# Altium PCB 192dfirst.PcbDoc
Units mm, origin at the board's own origin, x right, y up, seen from the top; angles counter-clockwise.
Board outline 184.27 x 133.63 mm, 2 copper layers (Top Layer, Bottom Layer); 61 components, 98 nets, 180 pads, 0 vias.
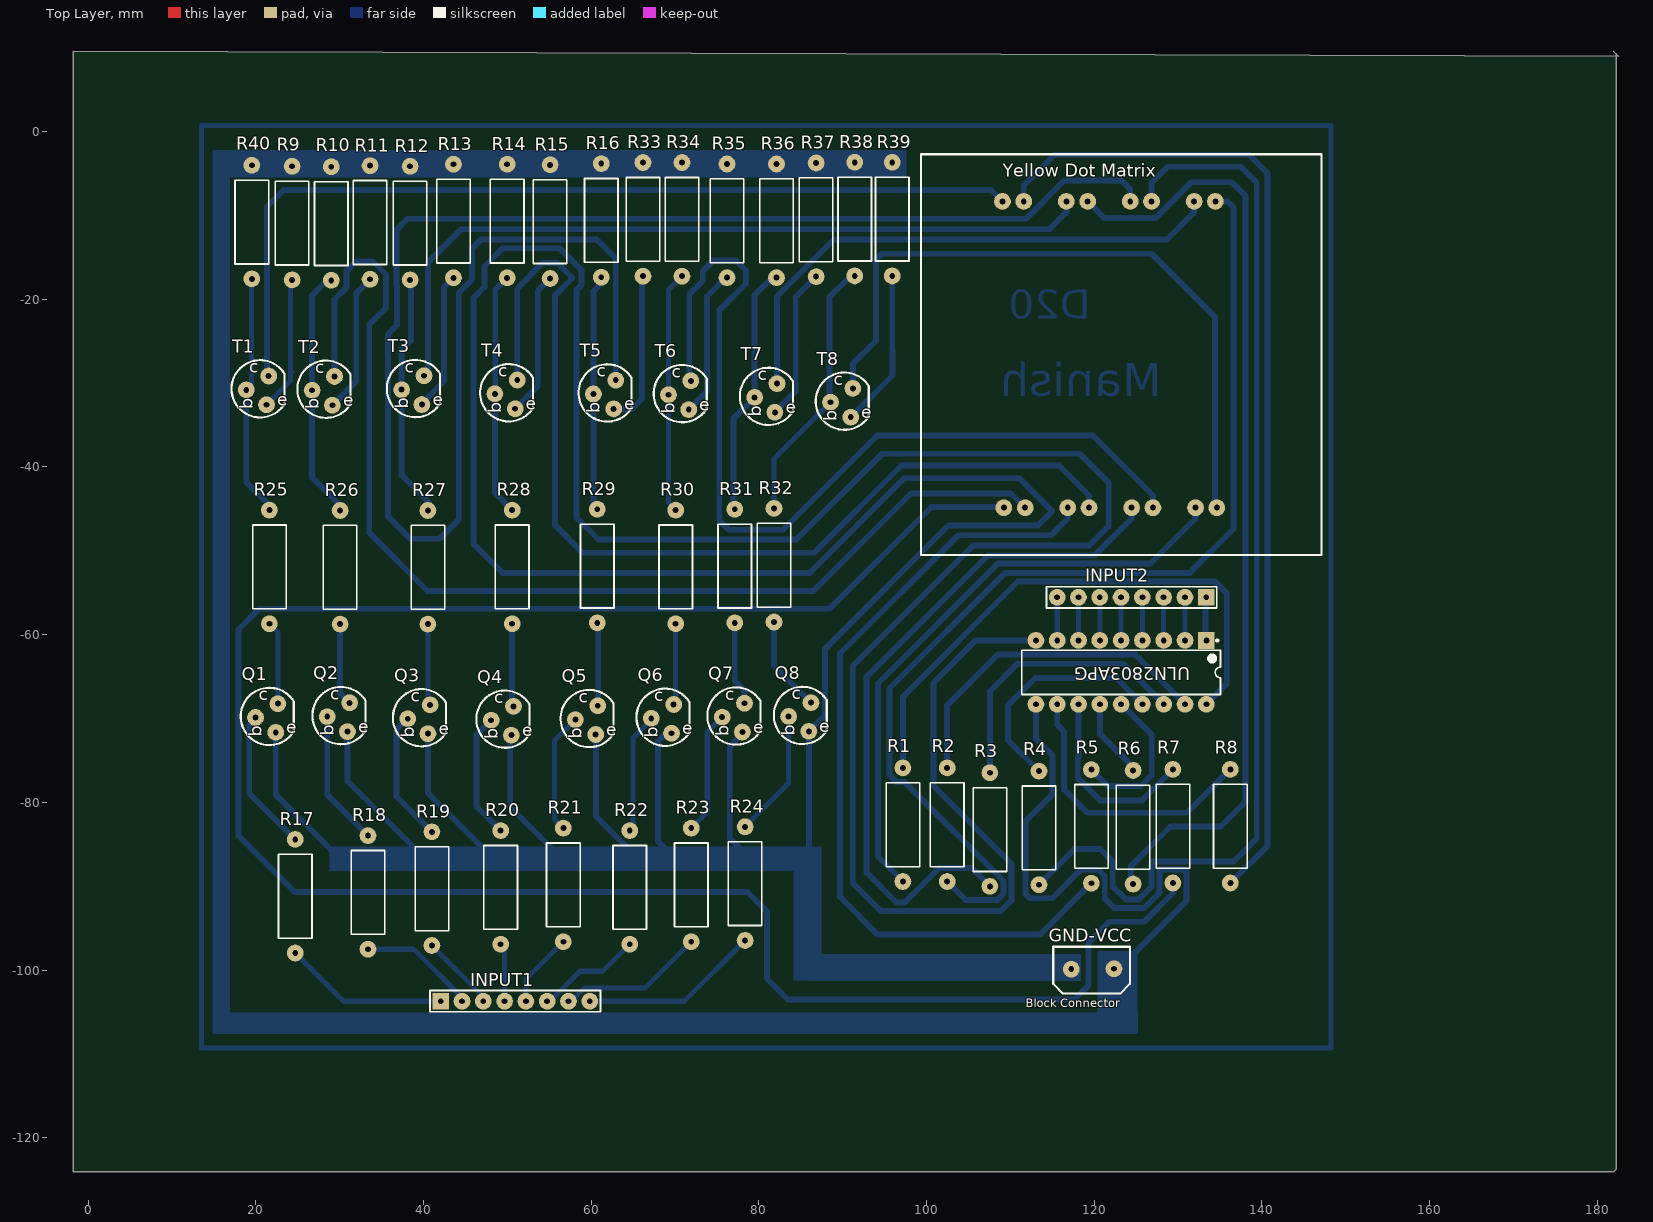
[diagram p0: Top Layer view]
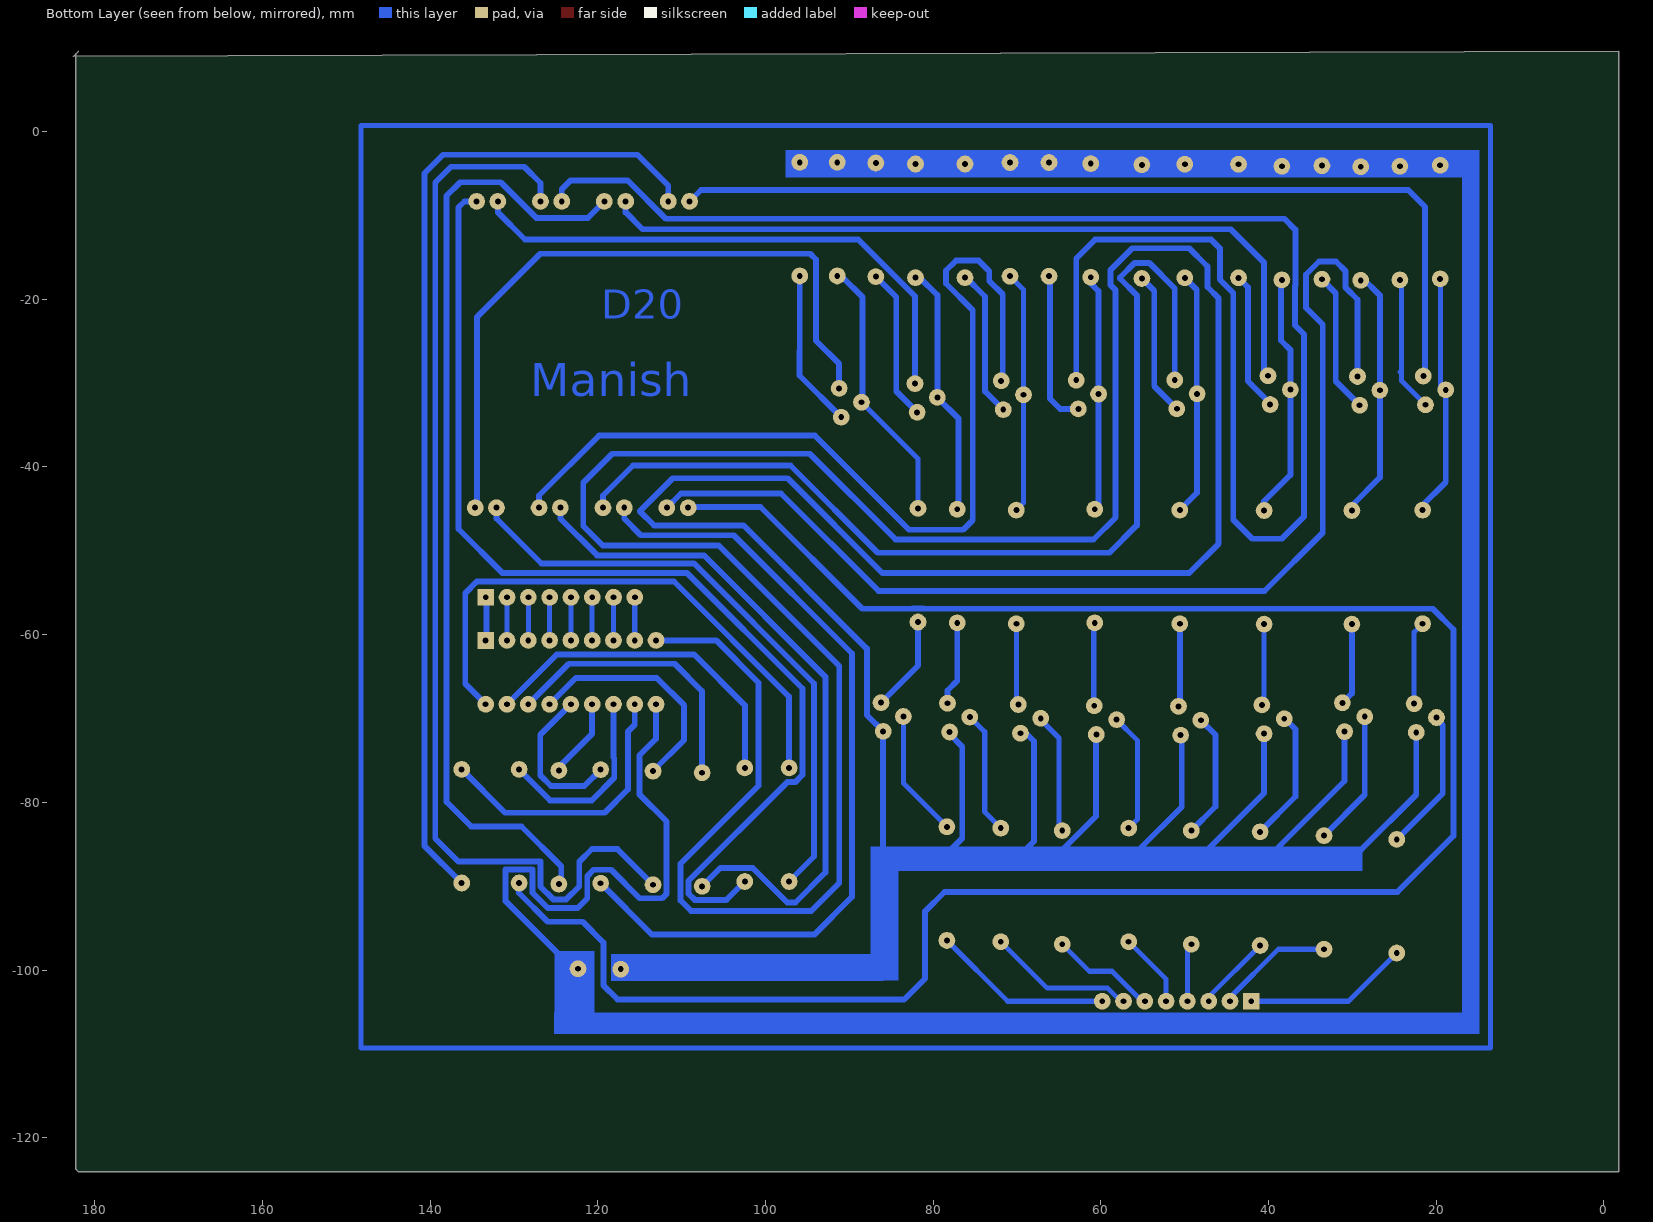
[diagram p1: Bottom Layer view, seen from below]

## Layer stack, top to bottom
Top Layer: signal copper 0.0356
Dielectric: dielectric 0.32, FR-4, Dk 4.8
Bottom Layer: signal copper 0.0356

## Board outline
-1.75,9.55 -1.75,-124.075 181.925,-124.075 182.225,-123.775 182.225,9.25 181.925,9.55 182.525,8.95

## Design rules (kind name [scope] priority, off if disabled: settings)
Clearance [All] p1: gap=0.254
PolygonConnect [All] p1: connectstyle=Relief reliefconductorwidth=0.254 reliefentries=4 polygonreliefangle="90 Angle"
RoutingVias [All] p1: holewidth=0.711 width=1.27 viastyle="Through Hole" minholewidth=0.711 minwidth=1.27 maxholewidth=0.711 maxwidth=1.27
SilkscreenOverComponentPads [All] p1: minsilkscreentomaskgap=0.254
SolderMaskExpansion [All] p1: expansion=0.102
Width [All] p1: maxlimit=0.8 minlimit=0.6 preferedwidth=0.7 minimp=50.000000 maximp=50.000000 favimp=50.000000
27 further rules are at their usual default settings.

## Components (designator, comment, footprint, x,y, rotation, side; value= is the part's Value field where it differs from the comment)
GND-VCC "Comment" "PCB Block Connector" 119.8,-99.875 r0 top
INPUT1 "Comment" HDR1X8 42.05,-103.725 r0 top
INPUT2 "Comment" HDR1X8 133.35,-55.55 r180 top
Q1 "Comment" "TO-92 Packaging" 21.3,-69.95 r0 top
Q2 "Comment" "TO-92 Packaging" 29.85,-69.85 r0 top
Q3 "Comment" "TO-92 Packaging" 39.45,-70.1 r0 top
Q4 "Comment" "TO-92 Packaging" 49.4,-70.275 r0 top
Q5 "Comment" "TO-92 Packaging" 59.45,-70.2 r0 top
Q6 "Comment" "TO-92 Packaging" 68.5,-70.05 r0 top
Q7 "Comment" "TO-92 Packaging" 76.95,-69.9 r0 top
Q8 "Comment" "TO-92 Packaging" 84.875,-69.825 r0 top
R1 "Comment" RES13.55-10X4 97.175,-82.675 r270 top
R2 "Comment" RES13.55-10X4 102.45,-82.675 r270 top
R3 "Comment" RES13.55-10X4 107.55,-83.25 r270 top
R4 "Comment" RES13.55-10X4 113.4,-83.05 r270 top
R5 "Comment" RES13.55-10X4 119.65,-82.875 r270 top
R6 "Comment" RES13.55-10X4 124.625,-82.975 r270 top
R7 "Comment" RES13.55-10X4 129.375,-82.85 r270 top
R8 "Comment" RES13.55-10X4 136.225,-82.85 r270 top
R9 "Comment" RES13.55-10X4 24.325,-10.925 r90 top
R10 "Comment" RES13.55-10X4 29,-10.975 r90 top
R11 "Comment" RES13.55-10X4 33.625,-10.85 r90 top
R12 "Comment" RES13.55-10X4 38.4,-10.925 r90 top
R13 "Comment" RES13.55-10X4 43.575,-10.675 r90 top
R14 "Comment" RES13.55-10X4 49.975,-10.675 r90 top
R15 "Comment" RES13.55-10X4 55.1,-10.75 r90 top
R16 "Comment" RES13.55-10X4 61.2,-10.6 r90 top
R17 "Comment" RES13.55-10X4 24.7,-91.2 r90 top
R18 "Comment" RES13.55-10X4 33.375,-90.75 r90 top
R19 "Comment" RES13.55-10X4 41,-90.3 r90 top
R20 "Comment" RES13.55-10X4 49.2,-90.15 r90 top
R21 "Comment" RES13.55-10X4 56.675,-89.85 r90 top
R22 "Comment" RES13.55-10X4 64.6,-90.15 r90 top
R23 "Comment" RES13.55-10X4 71.925,-89.85 r90 top
R24 "Comment" RES13.55-10X4 78.35,-89.7 r90 top
R25 "Comment" RES13.55-10X4 21.625,-51.925 r90 top
R26 "Comment" RES13.55-10X4 30.05,-51.975 r90 top
R27 "Comment" RES13.55-10X4 40.525,-51.975 r90 top
R28 "Comment" RES13.55-10X4 50.575,-51.925 r90 top
R29 "Comment" RES13.55-10X4 60.725,-51.825 r90 top
R30 "Comment" RES13.55-10X4 70.075,-51.925 r90 top
R31 "Comment" RES13.55-10X4 77.125,-51.825 r90 top
R32 "Comment" RES13.55-10X4 81.8,-51.725 r90 top
R33 "Comment" RES13.55-10X4 66.175,-10.475 r90 top
R34 "Comment" RES13.55-10X4 70.825,-10.475 r90 top
R35 "Comment" RES13.55-10X4 76.2,-10.65 r90 top
R36 "Comment" RES13.55-10X4 82.1,-10.65 r90 top
R37 "Comment" RES13.55-10X4 86.825,-10.525 r90 top
R38 "Comment" RES13.55-10X4 91.425,-10.45 r90 top
R39 "Comment" RES13.55-10X4 95.9,-10.45 r90 top
R40 "Comment" RES13.55-10X4 19.525,-10.8 r90 top
T1 "Comment" "TO-92 Packaging" 20.2,-30.875 r0 top
T2 "Comment" "TO-92 Packaging" 28.05,-30.925 r0 top
T3 "Comment" "TO-92 Packaging" 38.725,-30.85 r0 top
T4 "Comment" "TO-92 Packaging" 49.85,-31.35 r0 top
T5 "Comment" "TO-92 Packaging" 61.6,-31.369 r0 top
T6 "Comment" "TO-92 Packaging" 70.55,-31.45 r0 top
T7 "Comment" "TO-92 Packaging" 80.825,-31.775 r0 top
T8 "Comment" "TO-92 Packaging" 89.875,-32.35 r0 top
ULN2803APG "Comment" DIP-18 123.2,-64.5 r270 top
"Yellow Dot Matrix" "Comment" "Yellow or Green Dot Matrix DIsplay" 123.1,-26.6 r0 top

## Footprints (in the part's own frame and the unit in brackets; to place one, negate y for a bottom-side part, rotate by r counter-clockwise, add the part's x,y. Pads: shape width x height; smd on the part's side, far side on the other; paste and mask are expansions set on the pad)
DIP-18 [mm] "DIP, 18-Pin, Row Spacing 7.62 mm, Pitch 2.54 mm"
  rect 2x2 hole 0.7: 1(-3.81,10.16)
  round 2 hole 0.7: 2(-3.81,7.62) 3(-3.81,5.08) 4(-3.81,2.54) 5(-3.81,0) 6(-3.81,-2.54) 7(-3.81,-5.08) 8(-3.81,-7.62) 9(-3.81,-10.16) 10(3.81,-10.16) 11(3.81,-7.62) 12(3.81,-5.08) 13(3.81,-2.54) 14(3.81,0) 15(3.81,2.54) 16(3.81,5.08) 17(3.81,7.62) 18(3.81,10.16)
  silkscreen extent -3.93,-11.85 2.65,11.85, body extent -3.6,-11.8 3.6,11.8, height 5.33
HDR1X8 [mm]
  rect 2x2 hole 0.7: 1(0,0)
  round 2 hole 0.7: 2(2.54,0) 3(5.08,0) 4(7.62,0) 5(10.16,0) 6(12.7,0) 7(15.24,0) 8(17.78,0)
  silkscreen extent -1.27,-1.27 19.05,1.27
"PCB Block Connector" [mm]
  round 2 hole 0.7: 1(-2.547,-0.023) 2(2.547,0.023)
  silkscreen extent -4.7,-2.94 4.45,2.65
RES13.55-10X4 [mm] "Resistor, Axial; Body 10 x 4 mm (LxDia. max), Lead Dia. 0.65 mm (max)"
  round 2 hole 0.7: 1(-6.775,0) 2(6.775,0)
  silkscreen extent -5,-2 5,2
"TO-92 Packaging" [mm] "for 2N3904"
  round 2 hole 0.7: T(-1.333,0.063) T(1.079,-1.715) T(1.333,1.714)
  silkscreen extent -3.1,-3.23 3.22,3.61
"Yellow or Green Dot Matrix DIsplay" [mm] "Y or G Dot Matrix"
  round 2 hole 0.7: 3(-13.886,-18.262) 4(-11.346,-18.262) 6(-6.266,-18.262) 7(-3.726,-18.262) 9(1.354,-18.262) 10(3.894,-18.262) 12(8.974,-18.262) 13(11.514,-18.262) 20(11.346,18.262) 21(8.806,18.262) 23(3.726,18.262) 24(1.186,18.262) 26(-3.894,18.262) 27(-6.434,18.262) 29(-11.514,18.262) 30(-14.054,18.262)
  silkscreen extent -23.78,-23.9 23.99,23.89

## Nets (pads, with @x,y where several pads share a name; then routed paths per layer and width w, separated by ;. In a path a pad name is that pad's centre, name@x,y a point inside that pad or via, vN(x,y) a via of type N, cw(c..) or ccw(c..) an arc to the next point about the centre after c; other vN are vias at no path point)
1B: INPUT2.1 ULN2803APG.1 | length 5.2
  Bottom Layer w0.7: INPUT2.1 133.26,-55.64 133.26,-60.59 ULN2803APG.1
1C: R1.1 ULN2803APG.18 | length 67.7
  Bottom Layer w0.7: R1.1 97.175,-67.4 110.907,-53.668 134.411,-53.668 135.8,-55.057 135.8,-65.87 ULN2803APG.18
1D: "Yellow Dot Matrix.3" R7.2 | length 256.3
  Bottom Layer w0.7: 109.214,-44.775 100.575,-44.775 88.433,-56.917 82.486,-56.917 82.464,-56.896 81.136,-56.896 81.114,-56.917 20.408,-56.917 17.933,-59.392 17.933,-84.002 24.63,-90.699 78.649,-90.699 80.95,-93 80.95,-101.025 83.45,-103.525 117.625,-103.525 119.325,-101.825 119.325,-96.725 121.8,-94.25 125.95,-94.25 129.375,-90.825 R7.2 R7.2@128.888,-90.112
1U: 
2B: INPUT2.2 ULN2803APG.2 | length 5.1
  Bottom Layer w0.6: INPUT2.2 130.82,-55.56 ULN2803APG.2
2C: R2.1 ULN2803APG.17 | length 40.8
  Bottom Layer w0.7: R2.1 102.45,-68.431 108.502,-62.378 124.888,-62.378 ULN2803APG.17
2D: "Yellow Dot Matrix.4" T2.T@29.384,-29.211 | length 137.2
  Bottom Layer w0.7: T2.T@29.384,-29.211 29.384,-20.041 30.8,-18.625 30.8,-16.65 31.95,-15.5 33.975,-15.5 35.525,-17.05 35.525,-21.025 33.525,-23.025 33.525,-47.85 40.484,-54.809 86.496,-54.809 98.129,-43.176 110.068,-43.176 111.754,-44.862
2U: 
3B: INPUT2.3 ULN2803APG.3 | length 5.1
  Bottom Layer w0.6: INPUT2.3 128.28,-55.56 ULN2803APG.3
3C: R3.1 ULN2803APG.16 | length 33.8
  Bottom Layer w0.7: R3.1 107.55,-66.738 110.817,-63.471 123.441,-63.471 ULN2803APG.16
3D: "Yellow Dot Matrix.6" R5.2 | length 98.5
  Bottom Layer w0.7: 116.834,-44.862 116.834,-46.162 114.849,-48.146 103.779,-48.146 89.675,-62.25 89.675,-91.279 94.176,-95.779 113.521,-95.779 R5.2
3U: 
4B: INPUT2.4 ULN2803APG.4 | length 5.1
  Bottom Layer w0.6: INPUT2.4 125.74,-55.56 ULN2803APG.4
4C: R4.1 ULN2803APG.15 | length 28.1
  Bottom Layer w0.7: R4.1 109.695,-72.57 109.695,-68.443 112.965,-65.172 122.602,-65.172 ULN2803APG.15
4D: "Yellow Dot Matrix.7" T4.T@51.183,-29.636 | length 122.1
  Bottom Layer w0.7: T4.T@51.183,-29.636 51.183,-18.717 54.232,-15.668 55.968,-15.668 57.712,-17.412 57.712,-17.531 55.7,-19.543 55.7,-46.975 58.962,-50.237 86.588,-50.237 97,-39.825 115.787,-39.825 119.374,-43.412 119.374,-44.862
4U: 
5B: INPUT2.5 ULN2803APG.5 | length 5.1
  Bottom Layer w0.6: INPUT2.5 123.2,-55.56 ULN2803APG.5
5C: R5.1 ULN2803APG.14 | length 18.5
  Bottom Layer w0.7: R5.1 121.6,-78.05 125.575,-78.05 126.85,-76.775 126.85,-71.96 ULN2803APG.14
5D: "Yellow Dot Matrix.9" R3.2 | length 82.9
  Bottom Layer w0.7: R3.2 105.368,-87.843 101.503,-87.843 97.401,-91.944 96.411,-91.944 92.85,-88.383 92.85,-65.025 107.325,-50.55 120.065,-50.55 124.454,-46.162 124.454,-44.862
5U: 
6B: INPUT2.6 ULN2803APG.6 | length 5.1
  Bottom Layer w0.6: INPUT2.6 120.66,-55.56 ULN2803APG.6
6C: R6.1 ULN2803APG.13 | length 8.7
  Bottom Layer w0.7: ULN2803APG.13 120.66,-71.835 R6.1@124.35,-75.525
6D: "Yellow Dot Matrix.10" T6.T@71.884,-29.736 | length 112.3
  Bottom Layer w0.7: T6.T@71.884,-29.736 71.7,-29.552 71.7,-19.425 73.3,-17.825 73.3,-16.65 74.548,-15.402 77.277,-15.402 78.45,-16.575 78.45,-18.125 75.269,-21.306 75.269,-46.344 76.419,-47.494 82.873,-47.494 94.092,-36.275 119.857,-36.275 126.994,-43.412 126.994,-44.862
6U: 
7B: INPUT2.7 ULN2803APG.7 | length 5.1
  Bottom Layer w0.6: INPUT2.7 118.12,-55.56 ULN2803APG.7
7C: R7.1 ULN2803APG.12 | length 22.8
  Bottom Layer w0.7: ULN2803APG.12 118.12,-74.621 118.026,-74.715 118.026,-77.085 120.716,-79.775 125.675,-79.775 R7.1
7D: "Yellow Dot Matrix.12" R1.2 | length 72.2
  Bottom Layer w0.7: R1.2 94.2,-86.475 94.2,-65.825 108.5,-51.525 126.71,-51.525 132.074,-46.162 132.074,-44.862
7U: 
8B: INPUT2.8 ULN2803APG.8 | length 5.1
  Bottom Layer w0.6: INPUT2.8 115.58,-55.56 ULN2803APG.8
8C: R8.1 ULN2803APG.11 | length 33.6
  Bottom Layer w0.7: ULN2803APG.11 115.58,-70.753 116.4,-71.573 116.4,-78.481 119.169,-81.25 131.05,-81.25 R8.1
8D: "Yellow Dot Matrix.13" T8.T@91.209,-30.636 | length 83.2
  Bottom Layer w0.7: T8.T@91.209,-30.636 91.209,-27.711 93.975,-24.944 93.975,-15.259 94.658,-14.576 126.851,-14.576 134.375,-22.1 134.375,-44.623 134.614,-44.862
8U: 
9D: "Yellow Dot Matrix.20" R2.2 | length 128.3
  Bottom Layer w0.7: R2.2 104.639,-91.639 108.425,-91.639 109.162,-90.903 109.162,-89.368 97.386,-77.593 96.436,-77.593 95.571,-76.728 95.571,-66.429 109.368,-52.632 131.379,-52.632 136.6,-47.411 136.6,-9.041 135.896,-8.338 134.446,-8.338
10D: "Yellow Dot Matrix.21" T7.T@82.158,-30.06 | length 65.6
  Bottom Layer w0.7: T7.T@82.158,-30.06 82.158,-19.642 88.925,-12.875 128.669,-12.875 131.906,-9.638 131.906,-8.338
11D: "Yellow Dot Matrix.23" R4.2 | length 131.3
  Bottom Layer w0.7: R4.2 117.653,-85.572 120.688,-85.572 122.208,-87.092 122.208,-90.033 123.75,-91.575 125.3,-91.575 126.817,-90.058 126.817,-87.067 136.619,-87.067 139.375,-84.311 139.375,-6.075 137.5,-4.2 128.775,-4.2 126.826,-6.149 126.826,-8.338
12D: "Yellow Dot Matrix.24" T5.T@62.934,-29.655 | length 203
  Bottom Layer w0.7: T5.T@62.934,-29.655 62.934,-15.134 60.7,-12.9 46.825,-12.9 45.8,-13.925 45.8,-17.65 44.2,-19.25 44.2,-46.3 41.925,-48.575 38.425,-48.575 35.75,-45.9 35.75,-24.2 36.85,-23.1 36.85,-18.418 36.796,-18.364 36.796,-11.704 38.1,-10.4 111.875,-10.4 116.449,-5.826 123.225,-5.826 124.286,-6.888 124.286,-8.338
13D: "Yellow Dot Matrix.26" R6.2 | length 112.6
  Bottom Layer w0.7: 119.206,-8.338 121.169,-10.3 127.325,-10.3 131.575,-6.05 136.399,-6.05 138.025,-7.676 138.025,-79.946 135.095,-82.876 129.092,-82.876 124.35,-87.619 R6.2@124.35,-89.075
14D: "Yellow Dot Matrix.27" T3.T@40.058,-29.135 | length 93.6
  Bottom Layer w0.7: T3.T@40.058,-29.135 40.55,-28.644 40.55,-15.6 44.5,-11.65 114.654,-11.65 116.666,-9.638 116.666,-8.338
15D: "Yellow Dot Matrix.29" R8.2 | length 119.9
  Bottom Layer w0.7: 111.586,-8.338 111.586,-6.439 115.25,-2.775 138.45,-2.775 140.675,-5 140.675,-85.175 R8.2
16D: "Yellow Dot Matrix.30" T1.T@21.534,-29.16 | length 109.3
  Bottom Layer w0.7: T1.T@21.325,-29.16 21.325,-8.984 23.328,-6.981 107.69,-6.981 109.046,-8.338
b1: R25.2 R40.1 T1.T@18.867,-30.811 | length 29
  Bottom Layer w0.6: T1.T@19.5,-30.811 R40.1@19.5,-17.325
  Bottom Layer w0.7: T1.T@18.867,-30.811 18.867,-41.817 21.625,-44.575 R25.2
b2: R10.1 R26.2 T2.T@26.717,-30.862 | length 30.1
  Bottom Layer w0.7: R10.1@28.85,-17.4 26.717,-19.533 26.717,-30.862 26.717,-41.267 30.05,-44.6 R26.2@30.05,-45.275
b3: R12.1 R27.2 T3.T@37.391,-30.786 | length 29.6
  Bottom Layer w0.7: R12.1@38.5,-17.375 38.5,-24.925 37.391,-26.034 37.391,-30.786 37.391,-40.966 40.525,-44.1 R27.2
b4: R14.1 R28.2 T4.T@48.516,-31.287 | length 29.4
  Bottom Layer w0.7: T4.T@48.516,-31.287 48.516,-43.091 R28.2 ; T4.T@48.55,-31.525 48.55,-18.875 R14.1
b5: R16.1 R29.2 T5.T@60.267,-31.306 | length 28.3
  Bottom Layer w0.7: R29.2 60.267,-44.591 60.267,-31.306 60.267,-19.033 61.15,-18.15 R16.1@61.15,-17.325
b6: R30.2 R34.1 T6.T@69.217,-31.387 | length 28.9
  Bottom Layer w0.6: R30.2 69.217,-44.291 69.217,-31.387 69.217,-18.858 R34.1
b7: R31.2 R36.1 T7.T@79.491,-31.711 | length 30.1
  Bottom Layer w0.7: R31.2@76.95,-45.075 76.95,-34.253 79.491,-31.711 79.491,-19.509 81.575,-17.425 R36.1
b8: R32.2 R38.1 T8.T@88.542,-32.287 | length 31.3
  Bottom Layer w0.6: R32.2 81.8,-39.028 T8.T@88.542,-32.287
  Bottom Layer w0.7: T8.T@88.4,-32.287 88.4,-19.775 R38.1@90.775,-17.4
b9: Q1.T@19.967,-69.887 R17.2 | length 16.1
  Bottom Layer w0.7: Q1.T@19.4,-70.625 19.225,-70.8 19.225,-78.95 R17.2
b10: Q2.T@28.517,-69.786 R18.2 | length 16.2
  Bottom Layer w0.7: Q2.T@28.517,-69.786 28.517,-79.117 R18.2
b11: Q3.T@38.117,-70.037 R19.2 | length 16
  Bottom Layer w0.7: Q3.T@38.225,-69.85 36.775,-71.3 36.775,-79.3 R19.2
b12: Q4.T@48.067,-70.212 R20.2 | length 15.1
  Bottom Layer w0.7: Q4.T@48.067,-70.212 46.325,-71.953 46.325,-80.5 R20.2
b13: Q5.T@58.117,-70.137 R21.2 | length 14.4
  Bottom Layer w0.6: R21.2 55.642,-82.042 55.642,-72.612 Q5.T@58.117,-70.137
b14: Q6.T@67.167,-69.987 R22.2 | length 14.6
  Bottom Layer w0.6: R22.2 64.992,-82.983 64.992,-72.333 Q6.T@67.375,-69.95
b15: Q7.T@75.617,-69.837 R23.2 | length 14.8
  Bottom Layer w0.6: R23.2 73.842,-81.158 73.842,-71.587 73.867,-71.587 Q7.T@75.617,-69.837
b16: Q8.T@83.541,-69.762 R24.2 | length 15.3
  Bottom Layer w0.6: R24.2 83.541,-77.734 Q8.T@83.541,-69.762
c1: 
c2: 
c3: 
c4: 
c5: 
c6: 
c7: 
c8: 
c9: Q1.T@22.634,-68.236 R25.1 | length 10
  Bottom Layer w0.6: R25.1 22.634,-59.709 Q1.T@22.634,-68.236
c10: Q2.T@31.184,-68.135 R26.1 | length 9.8
  Bottom Layer w0.7: R26.1@30.05,-58.825 30.05,-67.002 Q2.T@31.184,-68.135
c11: Q3.T@40.784,-68.386 R27.1 | length 9.7
  Bottom Layer w0.6: R27.1 40.525,-68.127 Q3.T@40.784,-68.386
c12: Q4.T@50.734,-68.561 R28.1 | length 9.9
  Bottom Layer w0.7: Q4.T@50.575,-68.561 R28.1
c13: Q5.T@60.784,-68.486 R29.1 | length 9.7
  Bottom Layer w0.7: Q5.T@60.834,-68.28 R29.1@60.834,-58.6
c14: Q6.T@69.834,-68.336 R30.1 | length 9.7
  Bottom Layer w0.6: Q6.T@69.834,-68.336 70.075,-68.094 R30.1
c15: Q7.T@78.284,-68.186 R31.1 | length 10.1
  Bottom Layer w0.7: R31.1 77.125,-65.5 78.284,-66.659 Q7.T@78.284,-68.186
c16: Q8.T@86.208,-68.111 R32.1 | length 11.4
  Bottom Layer w0.7: R32.1 81.8,-63.702 Q8.T@86.208,-68.111
e1: R9.1 T1.T@21.28,-32.589 | length 16.4
  Bottom Layer w0.6: T1.T@21.28,-32.589 24.125,-29.744 24.125,-28.844 ; 24.3,-28.669 24.125,-28.844 ; R9.1 24.125,-17.9 24.125,-28.844
e2: R11.1 T2.T@29.13,-32.64 | length 16.9
  Bottom Layer w0.7: T2.T@29.13,-32.64 31.975,-29.794 31.975,-19.275 R11.1
e3: R13.1 T3.T@39.804,-32.564 | length 16.6
  Bottom Layer w0.7: T3.T@39.733,-32.492 42.45,-29.775 42.45,-18.575 R13.1
e4: R15.1 T4.T@50.929,-33.065 | length 17.3
  Bottom Layer w0.7: T4.T@50.929,-33.065 53.625,-30.369 53.625,-19 R15.1
e5: R33.1 T5.T@62.68,-33.084 | length 18.5
  Bottom Layer w0.7: T5.T@62.68,-33.084 64.841,-33.084 66.075,-31.85 66.075,-17.35 R33.1
e6: R35.1 T6.T@71.63,-33.165 | length 17.9
  Bottom Layer w0.7: T6.T@71.63,-33.165 73.8,-30.994 73.8,-19.675 R35.1@76.275,-17.2
e7: R37.1 T7.T@81.904,-33.489 | length 18.2
  Bottom Layer w0.7: T7.T@81.904,-33.489 84.4,-30.994 84.4,-19.725 R37.1
e8: R39.1 T8.T@90.955,-34.065 | length 18.7
  Bottom Layer w0.7: T8.T@90.955,-34.065 95.925,-29.094 95.925,-26.169 95.9,-26.194 R39.1@95.9,-17.5
e9: 
e10: 
e11: 
e12: 
e13: 
e14: 
e15: 
e16: 
GND: GND-VCC.1 Q1.T@22.38,-71.665 Q2.T@30.93,-71.564 Q3.T@40.53,-71.815 Q4.T@50.48,-71.99 Q5.T@60.53,-71.915 Q6.T@69.58,-71.765 Q7.T@78.03,-71.615 Q8.T@85.954,-71.54 ULN2803APG.9 | length 613.4
  Bottom Layer w0.7: Q1.T@22.38,-71.665 22.38,-79.09 28.986,-85.696 39.161,-85.696 ; Q2.T@30.93,-71.564 30.93,-77.464 39.161,-85.696 ; Q3.T@40.53,-71.815 40.53,-78.905 47.321,-85.696 ; 47.275,-16.1 47.275,-18.55 45.95,-19.875 45.95,-49.15 49.45,-52.65 86.05,-52.65 97.35,-41.35 111.05,-41.35 114.981,-45.281 113.287,-46.975 102.6,-46.975 87.9,-61.675 87.9,-69.594 85.954,-71.54 85.954,-93.73 ; 47.4,-15.975 49.45,-13.925 56.25,-13.925 58.825,-16.5 58.825,-18.325 58.225,-18.925 58.225,-46.025 60.862,-48.662 84.463,-48.662 94.7,-38.425 118.254,-38.425 121.725,-41.896 121.725,-47.046 119.396,-49.375 105.575,-49.375 91.2,-63.75 91.2,-89.629 94.531,-92.96 108.857,-92.96 110.127,-91.69 110.127,-87.321 100.83,-78.025 100.83,-65.734 105.875,-60.69 ULN2803APG.9 ; Q4.T@50.35,-71.99 50.35,-80.554 55.491,-85.696 ; Q5.T@60.575,-72.625 60.575,-81.661 64.545,-85.63 ; Q6.T@68.925,-71.765 67.975,-72.715 67.975,-84.64 69.03,-85.695 ; 77.9,-85.676 76.525,-84.301 76.525,-73.365 78.03,-71.86 Q7.T@78.03,-71.615 ; 81.789,-85.696 55.491,-85.696 ; 92.122,-99.898 GND-VCC.1 ; 39.161,-85.696 47.321,-85.696 ; 47.321,-85.696 55.491,-85.696
VCC: GND-VCC.2 R9.2 R10.2 R11.2 R12.2 R13.2 R14.2 R15.2 R16.2 R33.2 R34.2 R35.2 R36.2 R37.2 R38.2 R39.2 R40.2 ULN2803APG.10 | length 68.3
  Bottom Layer w0.7: ULN2803APG.10 113.04,-72.429 115.029,-74.418 115.029,-79.041 111.778,-82.292 111.778,-90.903 112.311,-91.436 115.004,-91.436 118.394,-88.046 120.49,-88.046 121.254,-88.81 121.254,-91.479 122.4,-92.625 125.926,-92.625 127.771,-90.78 127.771,-88.021 130.98,-88.021 130.98,-91.795 122.923,-99.852 GND-VCC.2
z1: INPUT1.1 R17.1 | length 19.7
  Bottom Layer w0.6: R17.1 30.45,-103.725 INPUT1.1
z2: INPUT1.2 R18.1 | length 14
  Bottom Layer w0.6: R18.1 38.825,-97.525 44.59,-103.29 INPUT1.2
z3: INPUT1.3 R19.1 | length 9.2
  Bottom Layer w0.6: R19.1 47.13,-103.205 INPUT1.3
z4: INPUT1.4 R20.1 | length 7
  Bottom Layer w0.6: R20.1 49.67,-97.395 INPUT1.4
z5: INPUT1.5 R21.1 | length 8.9
  Bottom Layer w0.6: INPUT1.5 52.21,-101.09 R21.1
z6: INPUT1.6 R22.1 | length 12.7
  Bottom Layer w0.6: INPUT1.6 55.092,-103.725 58.667,-100.15 61.375,-100.15 R22.1
z7: INPUT1.7 R23.1 | length 17.6
  Bottom Layer w0.6: INPUT1.7 57.632,-103.725 59.186,-102.171 66.379,-102.171 R23.1
z8: INPUT1.8 R24.1 | length 21.5
  Bottom Layer w0.6: INPUT1.8 71.1,-103.725 R24.1
copper on no net: | length 489.4
  Bottom Layer w0.6: 13.55,-109.275 13.55,0.725 148.225,0.725 148.225,-109.275 13.55,-109.275

## Other copper
Bottom Layer:
  rectangle net VCC: 14.85,-5.475 97.625,-2.2
  rectangle net GND: 28.775,-88.175 87.375,-85.3
  rectangle net GND: 84.15,-101.275 87.475,-85.3
  rectangle net GND: 85.925,-101.3 118.4,-98.1
  rectangle net VCC: 14.85,-107.4 16.9,-3.025
  rectangle net VCC: 14.85,-107.65 125.2,-105.05
  rectangle net VCC: 120.375,-106.45 125.125,-97.725
  text "D20" at 119.575,-22.325 h3.5
  text "Manish" at 128.025,-31.55 h3.94

## Text inside footprints (layer, text, board x,y; h text height)
GND-VCC: Top Overlay "Block Connector" at 111.799,-104.447 h1.02
Q1: Top Overlay "c" at 20.348,-67.854 h1.5; Top Overlay "e" at 23.65,-71.791 h1.5; Top Overlay "b" at 20.729,-72.172 h1.52 r90
Q2: Top Overlay "c" at 28.898,-67.754 h1.5; Top Overlay "e" at 32.2,-71.691 h1.5; Top Overlay "b" at 29.279,-72.072 h1.52 r90
Q3: Top Overlay "c" at 38.497,-68.004 h1.5; Top Overlay "e" at 41.799,-71.941 h1.5; Top Overlay "b" at 38.878,-72.322 h1.52 r90
Q4: Top Overlay "c" at 48.448,-68.18 h1.5; Top Overlay "e" at 51.75,-72.117 h1.5; Top Overlay "b" at 48.829,-72.498 h1.52 r90
Q5: Top Overlay "c" at 58.498,-68.104 h1.5; Top Overlay "e" at 61.8,-72.041 h1.5; Top Overlay "b" at 58.879,-72.422 h1.52 r90
Q6: Top Overlay "c" at 67.548,-67.954 h1.5; Top Overlay "e" at 70.85,-71.891 h1.5; Top Overlay "b" at 67.929,-72.272 h1.52 r90
Q7: Top Overlay "c" at 75.998,-67.804 h1.5; Top Overlay "e" at 79.3,-71.741 h1.5; Top Overlay "b" at 76.379,-72.122 h1.52 r90
Q8: Top Overlay "c" at 83.923,-67.729 h1.5; Top Overlay "e" at 87.225,-71.666 h1.5; Top Overlay "b" at 84.304,-72.047 h1.52 r90
T1: Top Overlay "c" at 19.248,-28.78 h1.5; Top Overlay "e" at 22.55,-32.717 h1.5; Top Overlay "b" at 19.629,-33.098 h1.52 r90
T2: Top Overlay "c" at 27.097,-28.83 h1.5; Top Overlay "e" at 30.399,-32.767 h1.5; Top Overlay "b" at 27.478,-33.148 h1.52 r90
T3: Top Overlay "c" at 37.773,-28.754 h1.5; Top Overlay "e" at 41.075,-32.691 h1.5; Top Overlay "b" at 38.154,-33.072 h1.52 r90
T4: Top Overlay "c" at 48.897,-29.255 h1.5; Top Overlay "e" at 52.199,-33.192 h1.5; Top Overlay "b" at 49.278,-33.573 h1.52 r90
T5: Top Overlay "c" at 60.647,-29.274 h1.5; Top Overlay "e" at 63.949,-33.211 h1.5; Top Overlay "b" at 61.028,-33.592 h1.52 r90
T6: Top Overlay "c" at 69.598,-29.355 h1.5; Top Overlay "e" at 72.9,-33.292 h1.5; Top Overlay "b" at 69.979,-33.673 h1.52 r90
T7: Top Overlay "c" at 79.872,-29.68 h1.5; Top Overlay "e" at 83.174,-33.617 h1.5; Top Overlay "b" at 80.253,-33.998 h1.52 r90
T8: Top Overlay "c" at 88.922,-30.254 h1.5; Top Overlay "e" at 92.224,-34.191 h1.5; Top Overlay "b" at 89.303,-34.572 h1.52 r90